# EAGLE board esp32-controller (EAGLE 9.6.2)
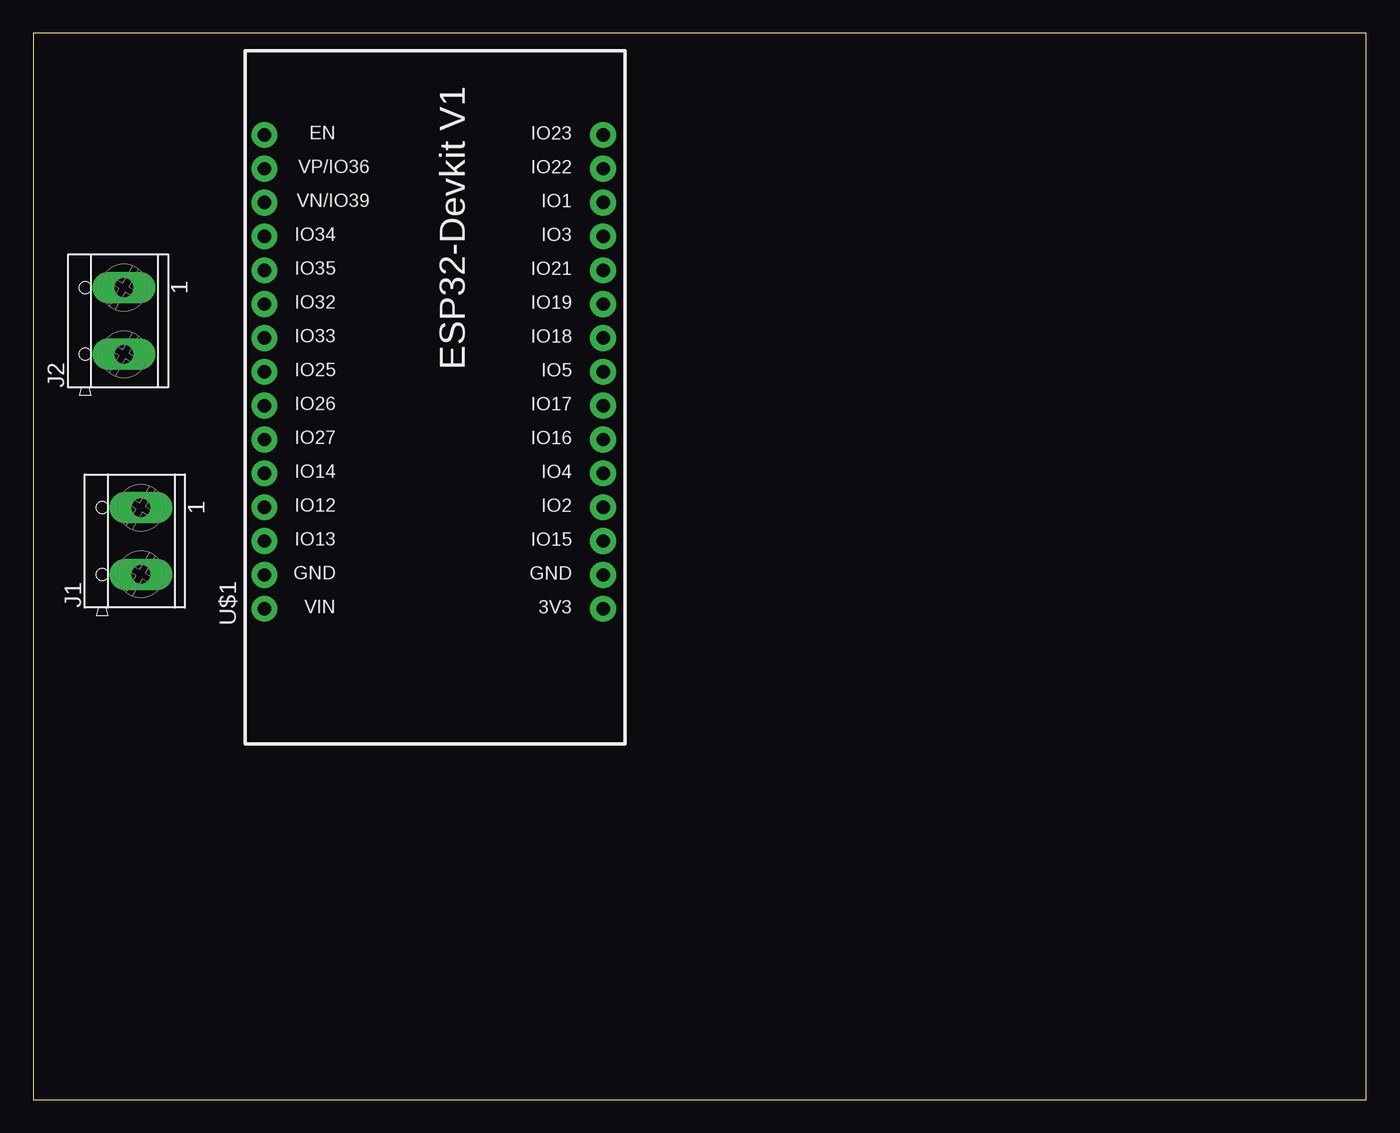
[diagram p0: board, top side]
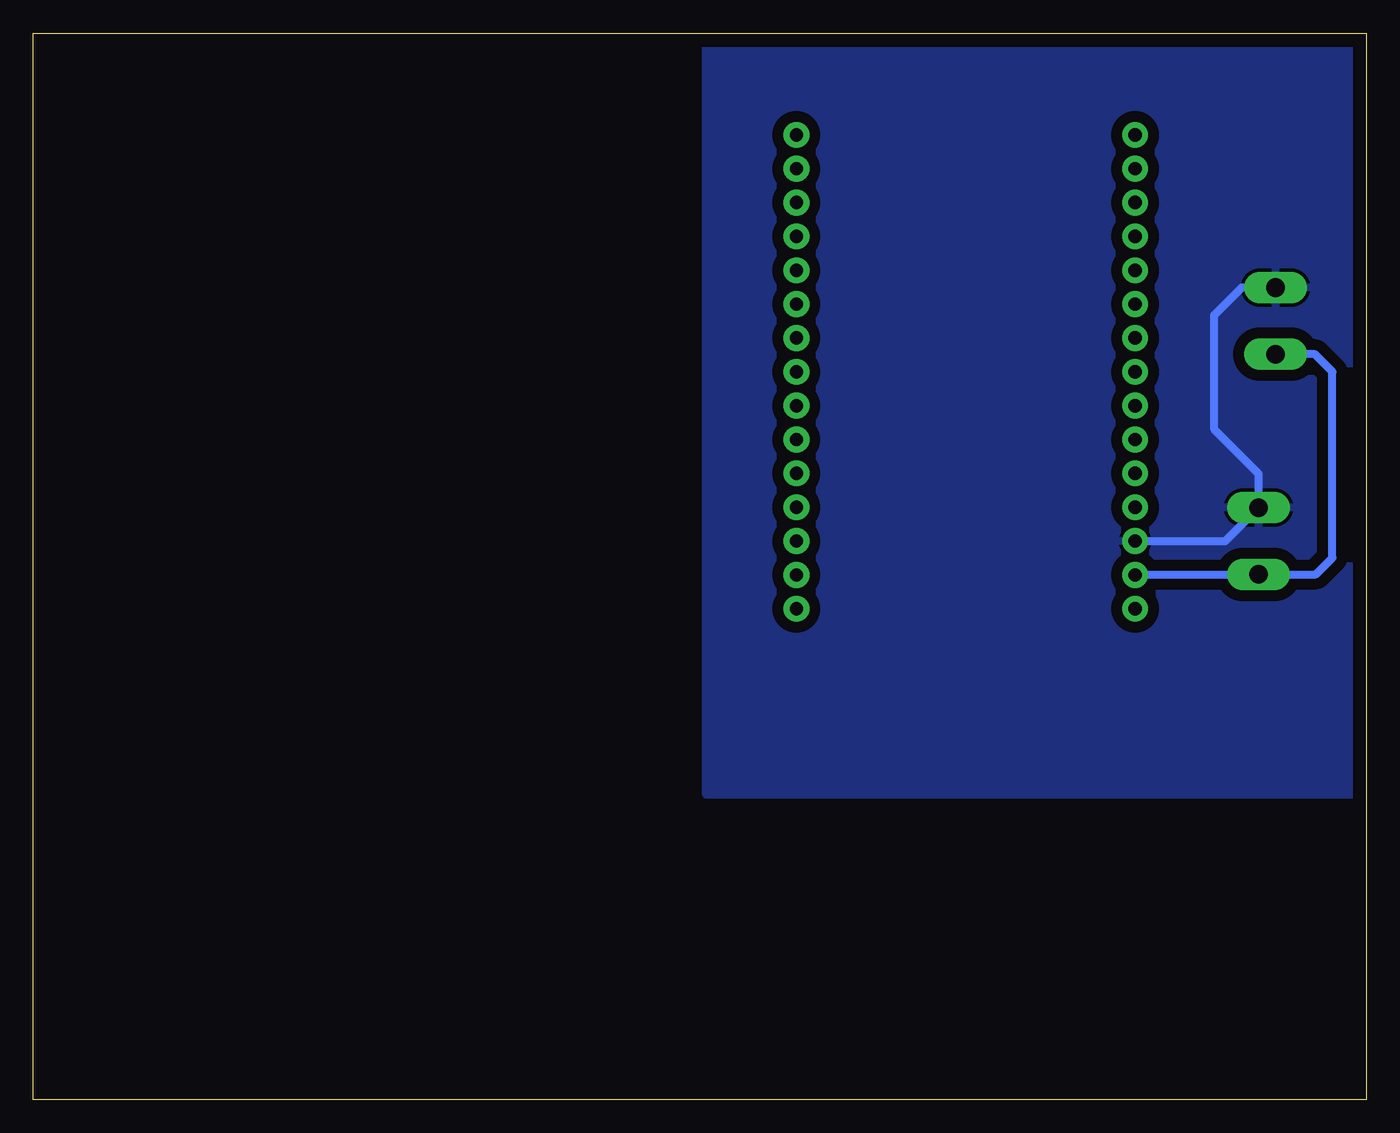
[diagram p1: board, bottom side, seen from below]

Size 100 x 80 mm. Coordinates in mm from the lower left corner, seen from the top.
Outline: 0,0 100,0 100,80 0,80 0,0
Copper layers (1*16): Top 0.035mm / dielectric 1.5mm / Bottom 0.035mm
Design rules "default": minimum track width 6mil, minimum drill 0.35mm, track to track 6mil, track to pad 6mil, pad to pad 6mil, via to via 6mil, smd to smd 6mil, copper to edge 40mil, drill to drill 6mil, minimum pad ring 10mil, minimum via ring 8mil, stop-mask expansion 4mil, vias tented up to drill 0mil, thermal gap 10mil

## Footprints (pad centres in the part's own frame; a part is rotated, then mirrored left to right if it is on the bottom)
TERMINAL_BLOCK_2P_5 = drill 1.4 pad 2.38 long: 1 2.5,-0.45; 2 -2.5,-0.45
ESP32-DEVKITV1 = drill 1 pad 1.93: 3V3 -16.52,-12.27; D1 13.96,-12.27; D2 -8.9,-12.27; D3 11.42,-12.27; D4 -6.36,-12.27; D5 1.26,-12.27; D12 -8.9,13.135; D13 -11.44,13.135; D14 -6.36,13.135; D15 -11.44,-12.27; D16 -3.82,-12.27; D17 -1.28,-12.27; D18 3.8,-12.27; D19 6.34,-12.27; D21 8.88,-12.27; D22 16.5,-12.27; D23 19.04,-12.27; D25 1.26,13.135; D26 -1.28,13.135; D27 -3.82,13.135; D32 6.34,13.135; D33 3.8,13.135; D34 11.42,13.135; D35 8.88,13.135; D36 16.5,13.135; D39 13.96,13.135; EN 19.04,13.135; GND@1 -13.98,13.135; GND@2 -13.98,-12.27; VIN -16.52,13.135

## Placement (x,y rotation side)
J1  CON_TERMINAL_BLOCK_02-5MM  [TERMINAL_BLOCK_2P_5]  7.62,41.91 90 top
J2  CON_TERMINAL_BLOCK_02-5MM  [TERMINAL_BLOCK_2P_5]  6.35,58.42 90 top
U$1  ESP32DEVKITV1  [ESP32-DEVKITV1]  30.48,53.34 90 top

## Library data of the parts
J1 J2 = tblok
U$1 = esp32-devkit

## Nets
GND: J1.1 J2.1 U$1.D13
HV: J1.2 J2.2 U$1.GND@1
LV: U$1.GND@2
LV1: U$1.D18
LV2: U$1.D16
LV3: U$1.D4
LV4: U$1.D2
N$1: U$1.D15

## Tracks (layer width: path | path; a pad name or v marks a point on that pad's centre or on a via)
GND
  Bottom 0.61: U$1.D13 10.58,41.9 J1.1 8.07,46.95 11.43,50.31 11.43,58.83 9.34,60.92 J2.1
  pour Bottom (isolate 0.813): 0,80.01 0,22.86 49.53,22.86 49.53,80.01
HV
  Bottom 0.61: U$1.GND@1 8.12,39.36 J1.2 3.77,39.41 2.54,40.64 2.54,54.61 3.85,55.92 J2.2